# Altium PCB PCB.PcbDoc (part 2 of 4)
Units mil, origin at the board's own origin, x right, y up, seen from the top; angles counter-clockwise.
Board outline 2958.79 x 990.23 mil, 2 copper layers (Component Side, Bottom Layer), stack 63.78 mil thick; 63 components, 40 nets, 198 pads, 73 vias.
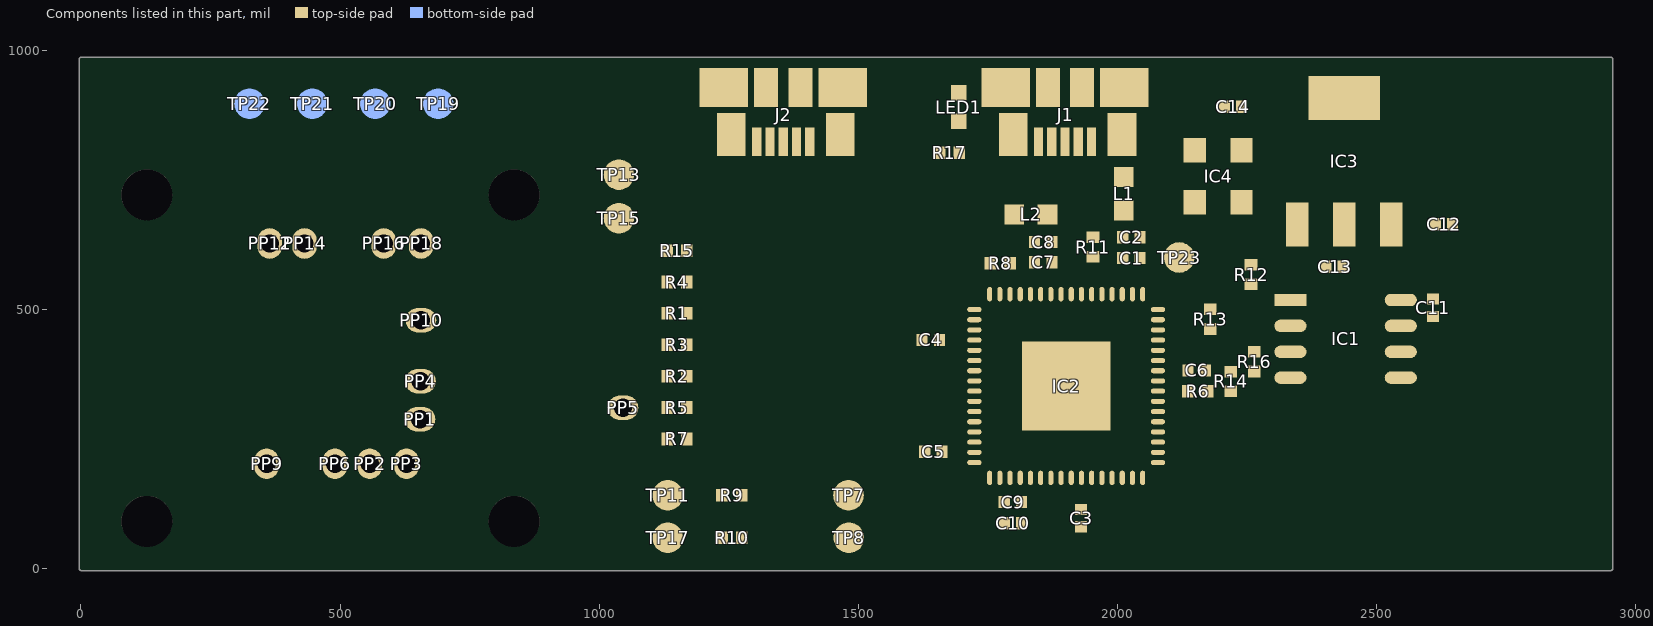
[diagram p2: the components of this part, seen from the top]

## Via types
v1: diameter 23.62, hole 9.84, Component Side to Bottom Layer, 73 vias

## Nets (pads, with @x,y where several pads share a name; then routed paths per layer and width w, separated by ;. In a path a pad name is that pad's centre, name@x,y a point inside that pad or via, vN(x,y) a via of type N, cw(c..) or ccw(c..) an arc to the next point about the centre after c; other vN are vias at no path point) (continued)
copper on no net: (continued)
  Component Side w0.3: 2697.65,749.29 2702.45,749.29 ; 2697.65,749.59 2702.45,749.59 ; 2697.65,749.89 2702.45,749.89 ; 2697.65,750.19 2702.45,750.19 ; 2697.65,750.49 2702.45,750.49 ; 2697.65,750.79 2702.45,750.79 ; 2697.95,745.99 2702.75,745.99 ; 2697.95,746.29 2702.75,746.29 ; 2697.95,746.59 2702.45,746.59 ; 2697.95,746.89 2702.45,746.89 ; 2697.95,747.19 2702.45,747.19 ; 2697.95,747.49 2702.45,747.49 ; 2697.95,747.79 2702.45,747.79 ; 2697.95,748.09 2702.45,748.09 ; 2697.95,748.39 2702.45,748.39 ; 2697.95,748.69 2702.45,748.69 ; 2697.95,748.99 2702.45,748.99 ; 2697.95,751.09 2702.45,751.09 ; 2697.95,751.39 2702.45,751.39 ; 2697.95,751.69 2702.45,751.69 ; 2697.95,751.99 2702.45,751.99 ; 2697.95,752.29 2702.45,752.29 ; 2697.95,752.59 2702.45,752.59 ; 2697.95,752.89 2702.45,752.89 ; 2697.95,753.19 2702.45,753.19 ; 2697.95,753.49 2702.45,753.49 ; 2697.95,753.79 2702.75,753.79 ; 2697.95,754.09 2702.75,754.09 ; 2698.25,744.49 2703.35,744.49 ; 2698.25,744.79 2703.35,744.79 ; 2698.25,745.09 2703.05,745.09 ; 2698.25,745.39 2703.05,745.39 ; 2698.25,745.69 2702.75,745.69 ; 2698.25,754.39 2702.75,754.39 ; 2698.25,754.69 2703.05,754.69 ; 2698.25,754.99 2703.05,754.99 ; 2698.25,755.29 2703.35,755.29 ; 2698.25,755.59 2703.35,755.59 ; 2698.55,743.59 2704.25,743.59 ; 2698.55,743.89 2703.95,743.89 ; 2698.55,744.19 2703.65,744.19 ; 2698.55,755.89 2703.65,755.89 ; 2698.55,756.19 2703.95,756.19 ; 2698.55,756.49 2704.25,756.49 ; 2698.85,742.99 2705.15,742.99 ; 2698.85,743.29 2704.85,743.29 ; 2698.85,756.79 2704.85,756.79 ; 2698.85,757.09 2705.45,757.09 ; 2699.15,742.39 2715.65,742.39 ; 2699.15,742.69 2706.05,742.69 ; 2699.15,757.39 2706.35,757.39 ; 2699.15,757.69 2715.65,757.69 ; 2699.45,742.09 2715.35,742.09 ; 2699.45,757.99 2715.35,757.99 ; 2699.75,741.79 2715.35,741.79 ; 2699.75,758.29 2715.35,758.29 ; 2700.05,741.19 2714.75,741.19 ; 2700.05,741.49 2715.05,741.49 ; 2700.05,758.59 2715.05,758.59 ; 2700.05,758.89 2714.75,758.89 ; 2700.35,740.89 2714.45,740.89 ; 2700.35,759.19 2714.45,759.19 ; 2700.65,740.59 2714.15,740.59 ; 2700.65,759.49 2714.15,759.49 ; 2700.95,740.29 2713.85,740.29 ; 2700.95,759.79 2713.85,759.79 ; 2701.25,739.99 2713.55,739.99 ; 2701.25,760.09 2713.55,760.09 ; 2701.85,739.69 2713.25,739.69 ; 2701.85,760.39 2713.25,760.39 ; 2702.15,739.39 2712.65,739.39 ; 2702.15,760.69 2712.65,760.69 ; 2702.75,739.09 2712.05,739.09 ; 2702.75,760.99 2712.05,760.99 ; 2703.35,738.79 2711.45,738.79 ; 2703.35,761.29 2711.45,761.29 ; 2704.25,738.49 2710.55,738.49 ; 2704.25,761.59 2710.55,761.59 ; 2705.15,761.89 2709.65,761.89 ; 2705.45,738.19 2709.65,738.19 ; 2708.75,742.69 2715.95,742.69 ; 2708.75,757.39 2715.95,757.39 ; 2709.65,742.99 2715.95,742.99 ; 2709.65,757.09 2715.95,757.09 ; 2710.25,743.29 2716.25,743.29 ; 2710.25,756.79 2716.25,756.79 ; 2710.55,743.59 2716.25,743.59 ; 2710.55,756.49 2716.25,756.49 ; 2710.85,743.89 2716.25,743.89 ; 2710.85,756.19 2716.25,756.19 ; 2711.15,744.19 2716.55,744.19 ; 2711.15,755.89 2716.55,755.89 ; 2711.45,744.49 2716.55,744.49 ; 2711.45,755.59 2716.55,755.59 ; 2711.75,744.79 2716.55,744.79 ; 2711.75,745.09 2716.85,745.09 ; 2711.75,754.99 2716.85,754.99 ; 2711.75,755.29 2716.55,755.29 ; 2712.05,745.39 2716.85,745.39 ; 2712.05,745.69 2716.85,745.69 ; 2712.05,754.39 2716.85,754.39 ; 2712.05,754.69 2716.85,754.69 ; 2712.35,745.99 2716.85,745.99 ; 2712.35,746.29 2716.85,746.29 ; 2712.35,746.59 2716.85,746.59 ; 2712.35,746.89 2717.15,746.89 ; 2712.35,747.19 2717.15,747.19 ; 2712.35,747.49 2717.15,747.49 ; 2712.35,752.59 2717.15,752.59 ; 2712.35,752.89 2717.15,752.89 ; 2712.35,753.19 2717.15,753.19 ; 2712.35,753.49 2716.85,753.49 ; 2712.35,753.79 2716.85,753.79 ; 2712.35,754.09 2716.85,754.09 ; 2712.65,747.79 2717.15,747.79 ; 2712.65,748.09 2717.15,748.09 ; 2712.65,748.39 2717.15,748.39 ; 2712.65,748.69 2717.15,748.69 ; 2712.65,748.99 2717.15,748.99 ; 2712.65,749.29 2717.15,749.29 ; 2712.65,749.59 2717.15,749.59 ; 2712.65,749.89 2717.15,749.89 ; 2712.65,750.19 2717.15,750.19 ; 2712.65,750.49 2717.15,750.49 ; 2712.65,750.79 2717.15,750.79 ; 2712.65,751.09 2717.15,751.09 ; 2712.65,751.39 2717.15,751.39 ; 2712.65,751.69 2717.15,751.69 ; 2712.65,751.99 2717.15,751.99 ; 2712.65,752.29 2717.15,752.29 ; 2721.35,700.69 2726.15,700.69 ; 2721.35,700.99 2726.15,700.99 ; 2721.35,701.29 2726.15,701.29 ; 2721.35,701.59 2726.15,701.59 ; 2721.35,701.89 2726.15,701.89 ; 2721.35,702.19 2726.15,702.19 ; 2721.35,702.49 2726.15,702.49 ; 2721.35,702.79 2726.15,702.79 ; 2721.35,703.09 2726.15,703.09 ; 2721.35,703.39 2726.15,703.39 ; 2721.35,703.69 2726.15,703.69 ; 2721.35,703.99 2726.15,703.99 ; 2721.35,704.29 2726.15,704.29 ; 2721.35,704.59 2726.15,704.59 ; 2721.35,704.89 2726.15,704.89 ; 2721.35,705.19 2726.15,705.19 ; 2721.35,705.49 2726.15,705.49 ; 2721.35,705.79 2726.15,705.79 ; 2721.35,706.09 2726.15,706.09 ; 2721.35,706.39 2726.15,706.39 ; 2721.35,706.69 2726.15,706.69 ; 2721.35,706.99 2726.15,706.99 ; 2721.35,707.29 2726.15,707.29 ; 2721.35,707.59 2726.15,707.59 ; 2721.35,707.89 2726.15,707.89 ; 2721.35,708.19 2726.15,708.19 ; 2721.35,708.49 2726.15,708.49 ; 2721.35,708.79 2726.15,708.79 ; 2721.35,709.09 2726.15,709.09 ; 2721.35,709.39 2726.15,709.39 ; 2721.35,709.69 2726.15,709.69 ; 2721.35,709.99 2726.15,709.99 ; 2721.35,710.29 2726.15,710.29 ; 2721.35,710.59 2726.15,710.59 ; 2721.35,710.89 2726.15,710.89 ; 2721.35,711.19 2726.15,711.19 ; 2721.35,711.49 2726.15,711.49 ; 2721.35,711.79 2726.15,711.79 ; 2721.35,712.09 2726.15,712.09 ; 2721.35,712.39 2726.15,712.39 ; 2721.35,712.69 2726.15,712.69 ; 2721.35,712.99 2726.15,712.99 ; 2721.35,713.29 2726.15,713.29 ; 2721.35,713.59 2726.15,713.59 ; 2721.35,713.89 2726.15,713.89 ; 2721.35,714.19 2726.15,714.19 ; 2721.35,714.49 2726.15,714.49 ; 2721.35,714.79 2726.15,714.79 ; 2721.35,715.09 2726.15,715.09 ; 2721.35,715.39 2726.15,715.39 ; 2721.35,715.69 2726.15,715.69 ; 2721.35,715.99 2726.15,715.99 ; 2721.35,716.29 2726.15,716.29 ; 2721.35,716.59 2726.45,716.59 ; 2721.35,716.89 2726.45,716.89 ; 2721.35,717.19 2726.45,717.19 ; 2721.35,717.49 2726.75,717.49 ; 2721.35,717.79 2726.75,717.79 ; 2721.35,718.09 2727.05,718.09 ; 2721.35,718.39 2727.35,718.39 ; 2721.35,718.69 2727.65,718.69 ; 2721.35,718.99 2727.95,718.99 ; 2721.35,719.29 2728.25,719.29 ; 2721.35,719.59 2728.85,719.59 ; 2721.35,719.89 2730.35,719.89 ; 2721.35,720.19 2739.35,720.19 ; 2721.35,720.49 2739.05,720.49 ; 2721.35,720.79 2739.05,720.79 ; 2721.35,721.09 2738.75,721.09 ; 2721.35,721.39 2738.75,721.39 ; 2721.35,721.69 2738.45,721.69 ; 2721.35,721.99 2726.15,721.99 ; 2721.35,722.29 2726.15,722.29 ; 2721.35,722.59 2726.15,722.59 ; 2721.35,722.89 2726.15,722.89 ; 2721.35,723.19 2726.15,723.19 ; 2721.35,723.49 2726.15,723.49 ; 2721.35,723.79 2726.15,723.79 ; 2721.35,724.09 2726.15,724.09 ; 2721.35,724.39 2726.15,724.39 ; 2721.35,724.69 2726.15,724.69 ; 2721.35,724.99 2726.15,724.99 ; 2721.35,725.29 2726.15,725.29 ; 2721.35,725.59 2726.15,725.59 ; 2721.35,725.89 2726.15,725.89 ; 2721.35,726.19 2726.15,726.19 ; 2721.35,726.49 2726.15,726.49 ; 2721.35,726.79 2726.15,726.79 ; 2721.35,727.09 2726.15,727.09 ; 2721.35,727.39 2726.15,727.39 ; 2721.35,727.69 2726.15,727.69 ; 2721.35,727.99 2726.15,727.99 ; 2721.35,728.29 2726.15,728.29 ; 2721.35,728.59 2726.15,728.59 ; 2721.35,728.89 2726.15,728.89 ; 2721.35,729.19 2726.15,729.19 ; 2721.35,729.49 2726.15,729.49 ; 2721.35,729.79 2726.15,729.79 ; 2721.35,730.09 2726.15,730.09 ; 2721.35,730.39 2726.15,730.39 ; 2721.35,730.69 2726.15,730.69 ; 2721.35,730.99 2726.15,730.99 ; 2721.35,731.29 2726.15,731.29 ; 2721.35,731.59 2726.15,731.59 ; 2721.35,731.89 2726.15,731.89 ; 2721.35,732.19 2726.15,732.19 ; 2721.35,732.49 2726.15,732.49 ; 2721.35,732.79 2726.15,732.79 ; 2721.35,733.09 2726.15,733.09 ; 2721.35,733.39 2726.15,733.39 ; 2721.35,733.69 2726.15,733.69 ; 2721.35,733.99 2726.15,733.99 ; 2721.35,734.29 2726.15,734.29 ; 2721.35,734.59 2726.15,734.59 ; 2721.35,734.89 2726.15,734.89 ; 2721.35,735.19 2726.15,735.19 ; 2721.35,735.49 2726.15,735.49 ; 2721.35,735.79 2726.15,735.79 ; 2721.35,736.09 2726.15,736.09 ; 2721.35,736.39 2726.15,736.39 ; 2721.35,736.69 2726.15,736.69 ; 2721.35,736.99 2726.15,736.99 ; 2721.35,737.29 2726.15,737.29 ; 2721.35,737.59 2726.15,737.59 ; 2721.35,737.89 2726.15,737.89 ; 2721.35,738.19 2726.15,738.19 ; 2721.35,738.49 2726.15,738.49 ; 2721.35,738.79 2726.15,738.79 ; 2721.35,739.09 2726.15,739.09 ; 2721.35,739.39 2726.15,739.39 ; 2721.35,739.69 2726.15,739.69 ; 2721.35,739.99 2726.15,739.99 ; 2721.35,740.29 2726.15,740.29 ; 2721.35,740.59 2726.15,740.59 ; 2721.35,740.89 2738.45,740.89 ; 2721.35,741.19 2738.75,741.19 ; 2721.35,741.49 2738.75,741.49 ; 2721.35,741.79 2739.05,741.79 ; 2721.35,742.09 2739.35,742.09 ; 2721.35,742.39 2739.35,742.39 ; 2721.35,742.69 2729.45,742.69 ; 2721.35,742.99 2728.55,742.99 ; 2721.35,743.29 2727.95,743.29 ; 2721.35,743.59 2727.65,743.59 ; 2721.35,743.89 2727.35,743.89 ; 2721.35,744.19 2727.35,744.19 ; 2721.35,744.49 2727.05,744.49 ; 2721.35,744.79 2726.75,744.79 ; 2721.35,745.09 2726.75,745.09 ; 2721.35,745.39 2726.45,745.39 ; 2721.35,745.69 2726.45,745.69 ; 2721.35,745.99 2726.45,745.99 ; 2721.35,746.29 2726.45,746.29 ; 2721.35,746.59 2726.15,746.59 ; 2721.35,746.89 2726.15,746.89 ; 2721.35,747.19 2726.15,747.19 ; 2721.35,747.49 2726.15,747.49 ; 2721.35,747.79 2726.15,747.79 ; 2721.35,748.09 2726.15,748.09 ; 2721.35,748.39 2726.15,748.39 ; 2721.35,748.69 2726.15,748.69 ; 2721.35,748.99 2726.15,748.99 ; 2721.35,749.29 2726.15,749.29 ; 2721.35,749.59 2726.15,749.59 ; 2721.35,749.89 2726.15,749.89 ; 2721.35,750.19 2726.15,750.19 ; 2721.35,750.49 2726.15,750.49 ; 2721.35,750.79 2726.15,750.79 ; 2721.35,751.09 2726.15,751.09 ; 2721.35,751.39 2726.15,751.39 ; 2721.35,751.69 2726.15,751.69 ; 2721.35,751.99 2726.15,751.99 ; 2721.35,752.29 2726.15,752.29 ; 2721.35,752.59 2726.15,752.59 ; 2721.35,752.89 2726.15,752.89 ; 2721.35,753.19 2726.15,753.19 ; 2721.35,753.49 2726.15,753.49 ; 2721.35,753.79 2726.45,753.79 ; 2721.35,754.09 2726.45,754.09 ; 2721.35,754.39 2726.45,754.39 ; 2721.35,754.69 2726.75,754.69 ; 2721.35,754.99 2726.75,754.99 ; 2721.35,755.29 2726.75,755.29 ; 2721.35,755.59 2727.05,755.59 ; 2721.35,755.89 2727.35,755.89 ; 2721.35,756.19 2727.35,756.19 ; 2721.35,756.49 2727.65,756.49 ; 2721.35,756.79 2728.25,756.79 ; 2721.35,757.09 2728.85,757.09 ; 2721.35,757.39 2729.45,757.39 ; 2721.35,757.69 2739.35,757.69 ; 2721.35,757.99 2739.35,757.99 ; 2721.35,758.29 2739.05,758.29 ; 2721.35,758.59 2738.75,758.59 ; 2721.35,758.89 2738.75,758.89 ; 2721.35,759.19 2738.45,759.19 ; 2721.35,759.49 2726.15,759.49 ; 2721.35,759.79 2726.15,759.79 ; 2721.35,760.09 2726.15,760.09 ; 2721.35,760.39 2726.15,760.39 ; 2721.35,760.69 2726.15,760.69 ; 2721.35,760.99 2726.15,760.99 ; 2721.35,761.29 2726.15,761.29 ; 2721.35,761.59 2726.15,761.59 ; 2723.15,840.18 2789.45,840.18 ; 2723.15,840.48 2789.45,840.48 ; 2723.15,840.78 2789.15,840.78 ; 2723.15,841.08 2789.15,841.08 ; 2723.15,841.38 2788.85,841.38 ; 2723.15,841.68 2788.85,841.68 ; 2723.15,841.98 2788.85,841.98 ; 2723.15,842.28 2788.55,842.28 ; 2723.15,842.58 2788.55,842.58 ; 2723.15,842.88 2788.55,842.88 ; 2723.15,843.18 2788.25,843.18 ; 2723.15,843.48 2788.25,843.48 ; 2723.15,843.78 2788.25,843.78 ; 2723.15,844.08 2787.95,844.08 ; 2723.15,844.38 2787.95,844.38 ; 2723.15,844.68 2787.95,844.68 ; 2723.15,844.98 2787.65,844.98 ; 2723.15,845.28 2787.65,845.28 ; 2723.15,845.58 2787.65,845.58 ; 2723.15,845.88 2787.65,845.88 ; 2723.15,846.18 2787.35,846.18 ; 2723.15,846.48 2787.35,846.48 ; 2723.15,846.78 2787.35,846.78 ; 2723.15,847.08 2787.35,847.08 ; 2723.15,847.38 2787.35,847.38 ; 2723.15,847.68 2787.05,847.68 ; 2723.15,847.98 2787.05,847.98 ; 2723.15,848.28 2787.05,848.28 ; 2723.15,848.58 2787.05,848.58 ; 2723.15,848.88 2787.05,848.88 ; 2723.15,849.18 2787.05,849.18 ; 2723.15,849.48 2787.05,849.48 ; 2723.15,849.78 2787.05,849.78 ; 2723.15,850.08 2787.05,850.08 ; 2723.15,850.38 2787.05,850.38 ; 2723.15,850.68 2787.05,850.68 ; 2723.15,850.98 2787.05,850.98 ; 2723.15,851.28 2786.75,851.28 ; 2723.15,851.58 2787.05,851.58 ; 2723.15,851.88 2787.05,851.88 ; 2723.15,852.18 2787.05,852.18 ; 2723.15,852.48 2787.05,852.48 ; 2723.15,852.78 2787.05,852.78 ; 2723.15,853.08 2787.05,853.08 ; 2723.15,853.38 2787.05,853.38 ; 2723.15,853.68 2787.05,853.68 ; 2723.15,853.98 2787.05,853.98 ; 2723.15,854.28 2787.05,854.28 ; 2723.15,854.58 2787.05,854.58 ; 2723.15,854.88 2787.05,854.88 ; 2723.15,855.18 2787.35,855.18 ; 2723.15,855.48 2787.35,855.48 ; 2723.15,855.78 2787.35,855.78 ; 2723.15,856.08 2787.35,856.08 ; 2723.15,856.38 2787.35,856.38 ; 2723.15,856.68 2787.35,856.68 ; 2723.15,856.98 2787.65,856.98 ; 2723.15,857.28 2787.65,857.28 ; 2723.15,857.58 2787.65,857.58 ; 2723.15,857.88 2787.65,857.88 ; 2723.15,858.18 2787.95,858.18 ; 2723.15,858.48 2787.95,858.48 ; 2723.15,858.78 2787.95,858.78 ; 2723.15,859.08 2788.25,859.08 ; 2723.15,859.38 2788.25,859.38 ; 2723.15,859.68 2788.25,859.68 ; 2723.15,859.98 2788.55,859.98 ; 2723.15,860.28 2788.55,860.28 ; 2723.15,860.58 2788.55,860.58 ; 2723.15,860.88 2788.85,860.88 ; 2723.15,861.18 2788.85,861.18 ; 2723.15,861.48 2789.15,861.48 ; 2723.15,861.78 2789.15,861.78 ; 2723.15,862.08 2789.45,862.08 ; 2723.15,862.38 2789.45,862.38 ; 2723.15,862.68 2789.75,862.68 ; 2723.15,862.98 2789.75,862.98 ; 2723.45,839.58 2789.75,839.58 ; 2723.45,839.88 2789.75,839.88 ; 2723.45,863.28 2790.05,863.28 ; 2723.75,863.58 2790.05,863.58 ; 2724.05,839.28 2790.05,839.28 ; 2724.95,863.88 2790.35,863.88 ; 2725.25,838.98 2790.05,838.98 ; 2726.45,721.99 2738.15,721.99 ; 2726.45,740.59 2738.15,740.59 ; 2726.45,759.49 2738.15,759.49 ; 2726.45,864.18 2790.35,864.18 ; 2726.75,722.29 2737.85,722.29 ; 2726.75,740.29 2737.85,740.29 ; 2726.75,759.79 2737.85,759.79 ; 2726.75,838.68 2790.35,838.68 ; 2727.05,722.59 2737.55,722.59 ; 2727.05,739.99 2737.55,739.99 ; 2727.05,760.09 2737.55,760.09 ; 2727.35,722.89 2736.95,722.89 ; 2727.35,739.69 2737.25,739.69 ; 2727.35,760.39 2737.25,760.39 ; 2727.65,760.69 2736.95,760.69 ; 2727.95,723.19 2736.65,723.19 ; 2727.95,739.39 2736.95,739.39 ; 2727.95,864.48 2790.65,864.48 ; 2728.25,760.99 2736.35,760.99 ; 2728.55,723.49 2736.05,723.49 ; 2728.55,739.09 2736.35,739.09 ; 2728.55,838.38 2790.65,838.38 ; 2728.85,723.79 2735.45,723.79 ; 2728.85,738.79 2736.05,738.79 ; 2728.85,761.29 2735.75,761.29 ; 2729.75,724.09 2734.85,724.09 ; 2729.75,738.49 2735.15,738.49 ; 2729.75,761.59 2735.15,761.59 ; 2729.75,864.78 2790.95,864.78 ; 2730.05,838.08 2790.65,838.08 ; 2730.35,738.19 2734.25,738.19 ; 2730.35,761.89 2734.25,761.89 ; 2731.25,724.39 2733.65,724.39 ; 2731.25,865.08 2790.95,865.08 ; 2731.55,719.89 2739.65,719.89 ; 2731.55,837.78 2790.95,837.78 ; 2732.15,742.69 2739.65,742.69 ; 2732.15,757.39 2739.65,757.39 ; 2732.75,719.59 2739.65,719.59 ; 2732.75,865.38 2791.25,865.38 ; 2733.05,742.99 2739.65,742.99 ; 2733.05,757.09 2739.65,757.09 ; 2733.35,719.29 2739.65,719.29 ; 2733.35,837.48 2791.25,837.48 ; 2733.65,718.99 2739.95,718.99 ; 2733.65,743.29 2739.65,743.29 ; 2733.65,756.79 2739.65,756.79 ; 2733.95,743.59 2739.65,743.59 ; 2733.95,756.49 2739.65,756.49 ; 2734.25,718.69 2739.95,718.69 ; 2734.25,743.89 2739.95,743.89 ; 2734.25,756.19 2739.95,756.19 ; 2734.55,718.09 2739.95,718.09 ; 2734.55,718.39 2739.95,718.39 ; 2734.55,744.19 2739.95,744.19 ; 2734.55,755.89 2739.95,755.89 ; 2734.55,865.68 2791.55,865.68 ; 2734.85,717.79 2739.95,717.79 ; 2734.85,744.49 2739.95,744.49 ; 2734.85,744.79 2739.95,744.79 ; 2734.85,755.29 2739.95,755.29 ; 2734.85,755.59 2739.95,755.59 ; 2734.85,837.18 2791.25,837.18 ; 2735.15,717.19 2740.25,717.19 ; 2735.15,717.49 2740.25,717.49 ; 2735.15,745.09 2739.95,745.09 ; 2735.15,745.39 2739.95,745.39 ; 2735.15,745.69 2739.95,745.69 ; 2735.15,754.39 2739.95,754.39 ; 2735.15,754.69 2739.95,754.69 ; 2735.15,754.99 2739.95,754.99 ; 2735.45,715.69 2740.25,715.69 ; 2735.45,715.99 2740.25,715.99 ; 2735.45,716.29 2740.25,716.29 ; 2735.45,716.59 2740.25,716.59 ; 2735.45,716.89 2740.25,716.89 ; 2735.45,745.99 2740.25,745.99 ; 2735.45,746.29 2740.25,746.29 ; 2735.45,746.59 2740.25,746.59 ; 2735.45,746.89 2740.25,746.89 ; 2735.45,747.19 2740.25,747.19 ; 2735.45,747.49 2740.25,747.49 ; 2735.45,752.59 2740.25,752.59 ; 2735.45,752.89 2740.25,752.89 ; 2735.45,753.19 2740.25,753.19 ; 2735.45,753.49 2740.25,753.49 ; 2735.45,753.79 2740.25,753.79 ; 2735.45,754.09 2740.25,754.09 ; 2735.75,700.69 2740.25,700.69 ; 2735.75,700.99 2740.25,700.99 ; 2735.75,701.29 2740.25,701.29 ; 2735.75,701.59 2740.25,701.59 ; 2735.75,701.89 2740.25,701.89 ; 2735.75,702.19 2740.25,702.19 ; 2735.75,702.49 2740.25,702.49 ; 2735.75,702.79 2740.25,702.79 ; 2735.75,703.09 2740.25,703.09 ; 2735.75,703.39 2740.25,703.39 ; 2735.75,703.69 2740.25,703.69 ; 2735.75,703.99 2740.25,703.99 ; 2735.75,704.29 2740.25,704.29 ; 2735.75,704.59 2740.25,704.59 ; 2735.75,704.89 2740.25,704.89 ; 2735.75,705.19 2740.25,705.19 ; 2735.75,705.49 2740.25,705.49 ; 2735.75,705.79 2740.25,705.79 ; 2735.75,706.09 2740.25,706.09 ; 2735.75,706.39 2740.25,706.39 ; 2735.75,706.69 2740.25,706.69 ; 2735.75,706.99 2740.25,706.99 ; 2735.75,707.29 2740.25,707.29 ; 2735.75,707.59 2740.25,707.59 ; 2735.75,707.89 2740.25,707.89 ; 2735.75,708.19 2740.25,708.19 ; 2735.75,708.49 2740.25,708.49 ; 2735.75,708.79 2740.25,708.79 ; 2735.75,709.09 2740.25,709.09 ; 2735.75,709.39 2740.25,709.39 ; 2735.75,709.69 2740.25,709.69 ; 2735.75,709.99 2740.25,709.99 ; 2735.75,710.29 2740.25,710.29 ; 2735.75,710.59 2740.25,710.59 ; 2735.75,710.89 2740.25,710.89 ; 2735.75,711.19 2740.25,711.19 ; 2735.75,711.49 2740.25,711.49 ; 2735.75,711.79 2740.25,711.79 ; 2735.75,712.09 2740.25,712.09 ; 2735.75,712.39 2740.25,712.39 ; 2735.75,712.69 2740.25,712.69 ; 2735.75,712.99 2740.25,712.99 ; 2735.75,713.29 2740.25,713.29 ; 2735.75,713.59 2740.25,713.59 ; 2735.75,713.89 2740.25,713.89 ; 2735.75,714.19 2740.25,714.19 ; 2735.75,714.49 2740.25,714.49 ; 2735.75,714.79 2740.25,714.79 ; 2735.75,715.09 2740.25,715.09 ; 2735.75,715.39 2740.25,715.39 ; 2735.75,747.79 2740.25,747.79 ; 2735.75,748.09 2740.25,748.09 ; 2735.75,748.39 2740.25,748.39 ; 2735.75,748.69 2740.25,748.69 ; 2735.75,748.99 2740.25,748.99 ; 2735.75,749.29 2740.25,749.29 ; 2735.75,749.59 2740.25,749.59 ; 2735.75,749.89 2740.25,749.89 ; 2735.75,750.19 2740.25,750.19 ; 2735.75,750.49 2740.25,750.49 ; 2735.75,750.79 2740.25,750.79 ; 2735.75,751.09 2740.25,751.09 ; 2735.75,751.39 2740.25,751.39 ; 2735.75,751.69 2740.25,751.69 ; 2735.75,751.99 2740.25,751.99 ; 2735.75,752.29 2740.25,752.29 ; 2736.05,865.98 2791.55,865.98 ; 2736.35,836.88 2791.55,836.88 ; 2737.85,866.28 2791.85,866.28 ; 2738.15,836.58 2791.85,836.58 ; 2739.35,866.58 2792.15,866.58 ; 2739.65,836.28 2791.85,836.28 ; 2740.85,797.29 2789.75,797.29 ; 2740.85,797.59 2789.75,797.59 ; 2740.85,866.88 2792.45,866.88 ; 2740.85,905.28 2882.75,905.28 ; 2740.85,905.58 2882.75,905.58 ; 2741.15,796.69 2789.45,796.69 ; 2741.15,796.99 2789.45,796.99 ; 2741.15,797.89 2789.75,797.89 ; 2741.15,798.19 2790.05,798.19 ; 2741.15,904.68 2882.45,904.68 ; 2741.15,904.98 2882.45,904.98 ; 2741.15,905.88 2882.45,905.88 ; 2741.15,906.18 2882.45,906.18 ; 2741.45,796.39 2789.15,796.39 ; 2741.45,798.49 2790.05,798.49 ; 2741.45,798.79 2790.35,798.79 ; 2741.45,835.98 2792.15,835.98 ; 2741.45,904.38 2882.15,904.38 ; 2741.45,906.48 2882.15,906.48 ; 2741.75,796.09 2789.15,796.09 ; 2741.75,799.09 2790.35,799.09 ; 2741.75,903.78 2881.85,903.78 ; 2741.75,904.08 2881.85,904.08 ; 2741.75,906.78 2881.85,906.78 ; 2742.05,795.79 2789.15,795.79 ; 2742.05,799.39 2790.65,799.39 ; 2742.05,799.69 2790.65,799.69 ; 2742.05,903.48 2881.55,903.48 ; 2742.05,907.08 2881.55,907.08 ; 2742.35,795.49 2788.85,795.49 ; 2742.35,799.99 2790.65,799.99 ; 2742.35,902.88 2881.25,902.88 ; 2742.35,903.18 2881.25,903.18 ; 2742.35,907.38 2881.25,907.38 ; 2742.65,795.19 2788.85,795.19 ; 2742.65,800.29 2790.95,800.29 ; 2742.65,800.59 2790.95,800.59 ; 2742.65,867.18 2792.45,867.18 ; 2742.65,902.58 2880.95,902.58 ; 2742.65,907.68 2880.95,907.68 ; 2742.95,794.89 2788.55,794.89 ; 2742.95,800.89 2791.25,800.89 ; 2742.95,835.68 2792.45,835.68 ; 2742.95,901.98 2880.65,901.98 ; 2742.95,902.28 2880.65,902.28 ; 2742.95,907.98 2880.65,907.98 ; 2743.25,794.59 2788.55,794.59 ; 2743.25,801.19 2791.25,801.19 ; 2743.25,901.68 2880.35,901.68 ; 2743.25,908.28 2880.35,908.28 ; 2743.55,794.29 2788.25,794.29 ; 2743.55,801.49 2791.25,801.49 ; 2743.55,801.79 2791.55,801.79 ; 2743.55,901.08 2880.05,901.08 ; 2743.55,901.38 2880.05,901.38 ; 2743.55,908.58 2880.05,908.58 ; 2743.85,706.09 2748.65,706.09 ; 2743.85,706.39 2748.35,706.39 ; 2743.85,706.69 2748.35,706.69 ; 2743.85,706.99 2748.35,706.99 ; 2743.85,707.29 2748.35,707.29 ; 2743.85,707.59 2748.05,707.59 ; 2743.85,707.89 2748.05,707.89 ; 2743.85,708.19 2748.35,708.19 ; 2743.85,708.49 2748.35,708.49 ; 2743.85,708.79 2748.35,708.79 ; 2743.85,746.59 2748.35,746.59 ; 2743.85,746.89 2748.35,746.89 ; 2743.85,747.19 2748.35,747.19 ; 2743.85,747.49 2748.35,747.49 ; 2743.85,747.79 2748.35,747.79 ; 2743.85,748.09 2748.35,748.09 ; 2743.85,748.39 2763.05,748.39 ; 2743.85,748.69 2763.05,748.69 ; 2743.85,748.99 2763.05,748.99 ; 2743.85,749.29 2763.05,749.29 ; 2743.85,749.59 2763.05,749.59 ; 2743.85,749.89 2763.05,749.89 ; 2743.85,750.19 2763.05,750.19 ; 2743.85,750.49 2763.05,750.49 ; 2743.85,750.79 2763.05,750.79 ; 2743.85,751.09 2763.05,751.09 ; 2743.85,751.39 2763.05,751.39 ; 2743.85,751.69 2763.05,751.69 ; 2743.85,751.99 2763.05,751.99 ; 2743.85,752.29 2748.35,752.29 ; 2743.85,752.59 2748.35,752.59 ; 2743.85,752.89 2748.35,752.89 ; 2743.85,753.19 2748.35,753.19 ; 2743.85,793.99 2788.25,793.99 ; 2743.85,802.09 2791.55,802.09 ; 2743.85,900.78 2879.75,900.78 ; 2743.85,908.88 2879.75,908.88 ; 2744.15,705.19 2749.85,705.19 ; 2744.15,705.49 2749.25,705.49 ; 2744.15,705.79 2748.95,705.79 ; 2744.15,709.09 2748.35,709.09 ; 2744.15,709.39 2748.65,709.39 ; 2744.15,709.69 2748.95,709.69 ; 2744.15,709.99 2749.25,709.99 ; 2744.15,745.39 2748.95,745.39 ; 2744.15,745.69 2748.65,745.69 ; 2744.15,745.99 2748.65,745.99 ; 2744.15,746.29 2748.65,746.29 ; 2744.15,753.49 2748.35,753.49 ; 2744.15,753.79 2748.35,753.79 ; 2744.15,754.09 2748.65,754.09 ; 2744.15,754.39 2748.65,754.39 ; 2744.15,793.69 2788.25,793.69 ; 2744.15,802.39 2791.85,802.39 ; 2744.15,802.69 2791.85,802.69 ; 2744.15,867.48 2792.75,867.48 ; 2744.15,900.18 2879.45,900.18 ; 2744.15,900.48 2879.45,900.48 ; 2744.15,909.18 2777.45,909.18 ; 2744.45,704.59 2762.75,704.59 ; 2744.45,704.89 2750.75,704.89 ; 2744.45,710.29 2749.85,710.29 ; 2744.45,710.59 2751.05,710.59 ; 2744.45,744.49 2749.25,744.49 ; 2744.45,744.79 2749.25,744.79 ; 2744.45,745.09 2748.95,745.09 ; 2744.45,754.69 2748.65,754.69 ; 2744.45,754.99 2748.95,754.99 ; 2744.45,755.29 2748.95,755.29 ; 2744.45,755.59 2749.25,755.59 ; 2744.45,793.39 2787.95,793.39 ; 2744.45,802.99 2791.85,802.99 ; 2744.45,835.38 2792.75,835.38 ; 2744.45,899.88 2879.15,899.88 ; 2744.45,909.48 2776.85,909.48 ; 2744.75,703.99 2762.75,703.99 ; 2744.75,704.29 2762.75,704.29 ; 2744.75,710.89 2762.75,710.89 ; 2744.75,711.19 2762.75,711.19 ; 2744.75,743.59 2750.15,743.59 ; 2744.75,743.89 2749.85,743.89 ; 2744.75,744.19 2749.55,744.19 ; 2744.75,755.89 2749.55,755.89 ; 2744.75,756.19 2749.55,756.19 ; 2744.75,793.09 2787.95,793.09 ; 2744.75,803.29 2792.15,803.29 ; 2744.75,803.59 2792.15,803.59 ; 2744.75,899.58 2878.85,899.58 ; 2744.75,909.78 2776.55,909.78 ; 2745.05,703.39 2762.75,703.39 ; 2745.05,703.69 2762.75,703.69 ; 2745.05,711.49 2762.75,711.49 ; 2745.05,721.09 2761.55,721.09 ; 2745.05,742.99 2751.05,742.99 ; 2745.05,743.29 2750.45,743.29 ; 2745.05,756.49 2749.85,756.49 ; 2745.05,756.79 2750.45,756.79 ; 2745.05,792.79 2776.25,792.79 ; 2745.05,803.89 2792.45,803.89 ; 2745.05,898.98 2878.55,898.98 ; 2745.05,899.28 2878.55,899.28 ; 2745.05,910.08 2776.25,910.08 ; 2745.35,703.09 2762.75,703.09 ; 2745.35,711.79 2762.75,711.79 ; 2745.35,721.39 2761.55,721.39 ; 2745.35,742.39 2752.55,742.39 ; 2745.35,742.69 2751.65,742.69 ; 2745.35,757.09 2750.75,757.09 ; 2745.35,757.39 2751.35,757.39 ; 2745.35,792.49 2775.65,792.49 ; 2745.35,804.19 2792.45,804.19 ; 2745.35,804.49 2792.75,804.49 ; 2745.35,898.68 2878.25,898.68 ; 2745.35,910.38 2775.65,910.38 ; 2745.65,702.79 2762.75,702.79 ; 2745.65,712.09 2762.75,712.09 ; 2745.65,712.39 2762.75,712.39 ; 2745.65,720.79 2761.85,720.79 ; 2745.65,721.69 2761.25,721.69 ; 2745.65,721.99 2760.95,721.99 ; 2745.65,742.09 2762.15,742.09 ; 2745.65,757.69 2752.25,757.69 ; 2745.65,757.99 2761.55,757.99 ; 2745.65,792.19 2775.05,792.19 ; 2745.65,804.79 2792.75,804.79 ; 2745.65,835.08 2793.05,835.08 ; 2745.65,867.78 2793.05,867.78 ; 2745.65,898.08 2877.95,898.08 ; 2745.65,898.38 2877.95,898.38 ; 2745.65,910.68 2775.35,910.68 ; 2745.95,702.49 2757.65,702.49 ; 2745.95,720.49 2762.15,720.49 ; 2745.95,741.49 2762.45,741.49 ; 2745.95,741.79 2762.45,741.79 ; 2745.95,758.29 2761.25,758.29 ; 2745.95,791.89 2774.75,791.89 ; 2745.95,805.09 2792.75,805.09 ; 2745.95,805.39 2793.05,805.39 ; 2745.95,897.78 2877.65,897.78 ; 2745.95,910.98 2774.75,910.98 ; 2746.25,702.19 2757.35,702.19 ; 2746.25,712.69 2762.75,712.69 ; 2746.25,720.19 2752.85,720.19 ; 2746.25,722.29 2760.65,722.29 ; 2746.25,741.19 2762.15,741.19 ; 2746.25,758.59 2760.95,758.59 ; 2746.25,758.89 2760.65,758.89 ; 2746.25,791.59 2774.15,791.59 ; 2746.25,805.69 2793.05,805.69 ; 2746.25,834.48 2793.35,834.48 ; 2746.25,834.78 2793.35,834.78 ; 2746.25,868.08 2793.35,868.08 ; 2746.25,897.18 2877.35,897.18 ; 2746.25,897.48 2877.35,897.48 ; 2746.25,911.28 2774.45,911.28 ; 2746.55,712.99 2762.75,712.99 ; 2746.55,722.59 2760.35,722.59 ; 2746.55,740.89 2761.85,740.89 ; 2746.55,759.19 2760.35,759.19 ; 2746.55,791.29 2773.85,791.29 ; 2746.55,805.99 2793.35,805.99 ; 2746.55,834.18 2793.65,834.18 ; 2746.55,896.88 2877.05,896.88 ; 2746.55,911.58 2773.85,911.58 ; 2746.85,701.89 2757.35,701.89 ; 2746.85,713.29 2762.75,713.29 ; 2746.85,719.89 2750.75,719.89 ; 2746.85,722.89 2760.05,722.89 ; 2746.85,740.59 2761.25,740.59 ; 2746.85,759.49 2760.05,759.49 ; 2746.85,790.99 2773.25,790.99 ; 2746.85,806.29 2793.35,806.29 ; 2746.85,806.59 2793.35,806.59 ; 2746.85,833.28 2794.85,833.28 ; 2746.85,833.58 2794.25,833.58 ; 2746.85,833.88 2793.95,833.88 ; 2746.85,868.38 2793.65,868.38 ; 2746.85,896.28 2876.75,896.28 ; 2746.85,896.58 2876.75,896.58 ; 2746.85,911.88 2773.55,911.88 ; 2747.15,701.59 2757.05,701.59 ; 2747.15,719.59 2749.85,719.59 ; 2747.15,740.29 2760.95,740.29 ; 2747.15,759.79 2759.75,759.79 ; 2747.15,790.69 2772.95,790.69 ; 2747.15,806.89 2793.65,806.89 ; 2747.15,832.68 2795.45,832.68 ; 2747.15,832.98 2795.15,832.98 ; 2747.15,868.68 2793.95,868.68 ; 2747.15,868.98 2794.25,868.98 ; 2747.15,895.98 2876.45,895.98 ; 2747.15,912.18 2772.95,912.18 ; 2747.45,713.59 2762.75,713.59 ; 2747.45,719.29 2749.55,719.29 ; 2747.45,723.19 2759.45,723.19 ; 2747.45,739.99 2760.65,739.99 ; 2747.45,760.09 2759.45,760.09 ; 2747.45,790.39 2772.65,790.39 ; 2747.45,807.19 2793.65,807.19 ; 2747.45,807.49 2793.95,807.49 ; 2747.45,831.78 2796.35,831.78 ; 2747.45,832.08 2796.05,832.08 ; 2747.45,832.38 2795.75,832.38 ; 2747.45,869.28 2794.55,869.28 ; 2747.45,869.58 2794.85,869.58 ; 2747.45,895.38 2876.15,895.38 ; 2747.45,895.68 2876.15,895.68 ; 2747.45,912.48 2772.65,912.48 ; 2747.75,701.29 2756.45,701.29 ; 2747.75,723.49 2758.85,723.49 ; 2747.75,790.09 2772.05,790.09 ; 2747.75,807.79 2793.95,807.79 ; 2747.75,831.18 2797.25,831.18 ; 2747.75,831.48 2796.95,831.48 ; 2747.75,869.88 2795.15,869.88 ; 2747.75,870.18 2795.45,870.18 ; 2747.75,870.48 2795.75,870.48 ; 2747.75,895.08 2875.85,895.08 ; 2747.75,912.78 2772.05,912.78 ; 2748.05,713.89 2762.75,713.89 ; 2748.05,718.99 2749.25,718.99 ; 2748.05,739.69 2760.05,739.69 ; 2748.05,760.39 2758.85,760.39 ; 2748.05,789.79 2771.75,789.79 ; 2748.05,808.09 2794.25,808.09 ; 2748.05,808.39 2794.25,808.39 ; 2748.05,830.28 2798.45,830.28 ; 2748.05,830.58 2798.15,830.58 ; 2748.05,830.88 2797.55,830.88 ; 2748.05,870.78 2796.35,870.78 ; 2748.05,871.08 2796.65,871.08 ; 2748.05,894.48 2875.55,894.48 ; 2748.05,894.78 2875.55,894.78 ; 2748.05,913.08 2771.75,913.08 ; 2748.35,700.99 2755.85,700.99 ; 2748.35,718.69 2748.95,718.69 ; 2748.35,739.39 2759.75,739.39 ; 2748.35,760.69 2758.55,760.69 ; 2748.35,789.49 2771.15,789.49 ; 2748.35,808.69 2794.25,808.69 ; 2748.35,829.68 2799.35,829.68 ; 2748.35,829.98 2798.75,829.98 ; 2748.35,871.38 2796.95,871.38 ; 2748.35,871.68 2797.55,871.68 ; 2748.35,894.18 2875.25,894.18 ; 2748.35,913.38 2771.45,913.38 ; 2748.65,723.79 2757.95,723.79 ; 2748.65,789.19 2770.85,789.19 ; 2748.65,808.99 2794.55,808.99 ; 2748.65,809.29 2794.55,809.29 ; 2748.65,828.78 2800.55,828.78 ; 2748.65,829.08 2800.25,829.08 ; 2748.65,829.38 2799.65,829.38 ; 2748.65,871.98 2797.85,871.98 ; 2748.65,872.28 2798.45,872.28 ; 2748.65,872.58 2798.75,872.58 ; 2748.65,893.88 2874.95,893.88 ; 2748.65,913.68 2770.85,913.68 ; 2748.95,739.09 2759.15,739.09 ; 2748.95,760.99 2757.95,760.99 ; 2748.95,788.89 2770.25,788.89 ; 2748.95,809.59 2794.85,809.59 ; 2748.95,828.18 2801.45,828.18 ; 2748.95,828.48 2801.15,828.48 ; 2748.95,872.88 2799.35,872.88 ; 2748.95,873.18 2799.95,873.18 ; 2748.95,893.28 2874.65,893.28 ; 2748.95,893.58 2874.65,893.58 ; 2748.95,913.98 2770.55,913.98 ; 2749.25,714.19 2762.75,714.19 ; 2749.25,788.59 2769.95,788.59 ; 2749.25,809.89 2794.85,809.89 ; 2749.25,810.19 2794.85,810.19 ; 2749.25,827.28 2802.05,827.28 ; 2749.25,827.58 2802.05,827.58 ; 2749.25,827.88 2801.75,827.88 ; 2749.25,873.48 2800.55,873.48 ; 2749.25,873.78 2801.15,873.78 ; 2749.25,892.98 2874.35,892.98 ; 2749.25,914.28 2769.95,914.28 ; 2749.55,700.69 2754.95,700.69 ; 2749.55,724.09 2757.05,724.09 ; 2749.55,761.29 2757.35,761.29 ; 2749.55,788.29 2769.35,788.29 ; 2749.55,810.49 2795.15,810.49 ; 2749.55,826.68 2801.75,826.68 ; 2749.55,826.98 2802.05,826.98 ; 2749.55,874.08 2801.75,874.08 ; 2749.55,874.38 2802.35,874.38 ; 2749.55,874.68 2803.25,874.68 ; 2749.55,892.38 2874.05,892.38 ; 2749.55,892.68 2874.05,892.68 ; 2749.55,914.58 2769.65,914.58 ; 2749.85,738.79 2758.55,738.79 ; 2749.85,787.99 2769.05,787.99 ; 2749.85,810.79 2795.15,810.79 ; 2749.85,811.09 2795.45,811.09 ; 2749.85,825.78 2801.45,825.78 ; 2749.85,826.08 2801.45,826.08 ; 2749.85,826.38 2801.75,826.38 ; 2749.85,874.98 2803.85,874.98 ; 2749.85,875.28 2805.05,875.28 ; 2749.85,892.08 2873.75,892.08 ; 2749.85,914.88 2769.05,914.88 ; 2750.15,761.59 2756.45,761.59 ; 2750.15,787.69 2768.45,787.69 ; 2750.15,811.39 2795.45,811.39 ; 2750.15,825.18 2801.15,825.18 ; 2750.15,825.49 2801.45,825.49 ; 2750.15,875.58 2806.25,875.58 ; 2750.15,875.88 2807.75,875.88 ; 2750.15,876.18 2810.15,876.18 ; 2750.15,891.48 2873.45,891.48 ; 2750.15,891.78 2873.45,891.78 ; 2750.15,915.18 2768.75,915.18 ; 2750.45,738.49 2757.65,738.49 ; 2750.45,787.39 2768.15,787.39 ; 2750.45,811.69 2795.45,811.69 ; 2750.45,824.28 2800.85,824.28 ; 2750.45,824.58 2800.85,824.58 ; 2750.45,824.88 2801.15,824.88 ; 2750.45,876.48 2873.15,876.48 ; 2750.45,876.78 2873.15,876.78 ; 2750.45,891.18 2873.15,891.18 ; 2750.45,915.48 2768.15,915.48 ; 2750.75,787.09 2767.85,787.09 ; 2750.75,811.99 2795.75,811.99 ; 2750.75,812.29 2795.75,812.29 ; 2750.75,823.68 2800.55,823.68 ; 2750.75,823.99 2800.55,823.99 ; 2750.75,877.08 2872.85,877.08 ; 2750.75,877.38 2872.85,877.38 ; 2750.75,890.58 2872.85,890.58 ; 2750.75,890.88 2872.85,890.88 ; 2750.75,915.78 2767.85,915.78 ; 2751.05,786.79 2767.25,786.79 ; 2751.05,812.59 2796.05,812.59 ; 2751.05,822.78 2800.25,822.78 ; 2751.05,823.09 2800.25,823.09 ; 2751.05,823.38 2800.55,823.38 ; 2751.05,877.68 2872.55,877.68 ; 2751.05,877.98 2872.55,877.98 ; 2751.05,878.28 2872.55,878.28 ; 2751.05,890.28 2872.55,890.28 ; 2751.05,916.08 2767.25,916.08 ; 2751.35,724.39 2755.25,724.39 ; 2751.35,761.89 2755.55,761.89 ; 2751.35,786.49 2766.95,786.49 ; 2751.35,812.89 2796.05,812.89 ; 2751.35,813.19 2796.35,813.19 ; 2751.35,822.18 2799.95,822.18 ; 2751.35,822.49 2799.95,822.49 ; 2751.35,878.58 2872.25,878.58 ; 2751.35,878.88 2872.25,878.88 ; 2751.35,889.68 2872.25,889.68 ; 2751.35,889.98 2872.25,889.98 ; 2751.35,916.38 2766.95,916.38 ; 2751.65,700.39 2752.85,700.39 ; 2751.65,738.19 2756.45,738.19 ; 2751.65,786.19 2766.35,786.19 ; 2751.65,813.49 2796.35,813.49 ; 2751.65,821.28 2799.65,821.28 ; 2751.65,821.59 2799.65,821.59 ; 2751.65,821.88 2799.95,821.88 ; 2751.65,879.18 2871.95,879.18 ; 2751.65,879.48 2871.95,879.48 ; 2751.65,889.38 2871.95,889.38 ; 2751.65,916.68 2766.35,916.68 ; 2751.95,785.89 2766.05,785.89 ; 2751.95,813.79 2796.35,813.79 ; 2751.95,814.09 2796.65,814.09 ; 2751.95,820.68 2799.35,820.68 ; 2751.95,820.99 2799.35,820.99 ; 2751.95,879.78 2871.65,879.78 ; 2751.95,880.08 2871.65,880.08 ; 2751.95,880.38 2871.65,880.38 ; 2751.95,889.08 2871.65,889.08 ; 2751.95,916.98 2766.05,916.98 ; 2752.25,785.59 2765.45,785.59 ; 2752.25,814.39 2796.65,814.39 ; 2752.25,819.78 2799.05,819.78 ; 2752.25,820.09 2799.05,820.09 ; 2752.25,820.38 2799.05,820.38 ; 2752.25,880.68 2871.35,880.68 ; 2752.25,880.98 2871.35,880.98 ; 2752.25,888.48 2871.35,888.48 ; 2752.25,888.78 2871.35,888.78 ; 2752.25,917.28 2765.75,917.28 ; 2752.55,785.29 2765.15,785.29 ; 2752.55,814.69 2796.95,814.69 ; 2752.55,814.99 2796.95,814.99 ; 2752.55,819.18 2798.75,819.18 ; 2752.55,819.49 2798.75,819.49 ; 2752.55,881.28 2871.05,881.28 ; 2752.55,881.58 2871.05,881.58 ; 2752.55,888.18 2871.05,888.18 ; 2752.55,917.58 2765.15,917.58 ; 2752.85,784.99 2764.55,784.99 ; 2752.85,815.29 2796.95,815.29 ; 2752.85,818.28 2798.45,818.28 ; 2752.85,818.59 2798.45,818.59 ; 2752.85,818.88 2798.45,818.88 ; 2752.85,881.88 2870.75,881.88 ; 2752.85,882.18 2870.75,882.18 ; 2752.85,882.48 2870.75,882.48 ; 2752.85,887.58 2870.75,887.58 ; 2752.85,887.88 2870.75,887.88 ; 2752.85,917.88 2764.85,917.88 ; 2753.15,784.69 2764.25,784.69 ; 2753.15,815.59 2797.25,815.59 ; 2753.15,815.89 2797.25,815.89 ; 2753.15,817.68 2798.15,817.68 ; 2753.15,817.99 2798.15,817.99 ; 2753.15,882.78 2870.45,882.78 ; 2753.15,883.08 2870.45,883.08 ; 2753.15,887.28 2870.45,887.28 ; 2753.15,918.18 2764.25,918.18 ; 2753.45,720.19 2762.15,720.19 ; 2753.45,784.39 2763.65,784.39 ; 2753.45,816.18 2797.55,816.18 ; 2753.45,816.49 2797.55,816.49 ; 2753.45,816.79 2797.85,816.79 ; 2753.45,817.09 2797.85,817.09 ; 2753.45,817.38 2797.85,817.38 ; 2753.45,883.38 2870.15,883.38 ; 2753.45,883.68 2870.15,883.68 ; 2753.45,886.68 2870.15,886.68 ; 2753.45,886.98 2870.15,886.98 ; 2753.45,918.48 2763.95,918.48 ; 2753.75,784.09 2763.35,784.09 ; 2753.75,883.98 2869.85,883.98 ; 2753.75,884.28 2869.85,884.28 ; 2753.75,884.58 2869.85,884.58 ; 2753.75,886.08 2869.85,886.08 ; 2753.75,886.38 2869.85,886.38 ; 2753.75,918.78 2763.35,918.78 ; 2754.05,783.79 2763.05,783.79 ; 2754.05,884.88 2869.55,884.88 ; 2754.05,885.18 2869.55,885.18 ; 2754.05,885.48 2869.55,885.48 ; 2754.05,885.78 2869.55,885.78 ; 2754.05,919.08 2763.05,919.08 ; 2754.35,783.49 2762.45,783.49 ; 2754.35,919.38 2762.45,919.38 ; 2754.65,757.69 2761.55,757.69 ; 2754.65,783.19 2762.15,783.19 ; 2754.65,919.68 2762.15,919.68 ; 2754.95,782.89 2761.55,782.89 ; 2754.95,919.98 2761.55,919.98 ; 2755.25,742.39 2761.85,742.39 ; 2755.25,782.59 2761.25,782.59 ; 2755.25,920.28 2761.25,920.28 ; 2755.55,757.39 2761.85,757.39 ; 2755.55,782.29 2760.65,782.29 ; 2755.55,920.58 2760.95,920.58 ; 2755.85,704.89 2762.75,704.89 ; 2755.85,719.89 2762.15,719.89 ; 2755.85,781.99 2760.35,781.99 ; 2755.85,920.88 2760.35,920.88 ; 2756.15,757.09 2761.85,757.09 ; 2756.15,781.69 2759.75,781.69 ; 2756.15,921.18 2760.05,921.18 ; 2756.45,742.69 2761.55,742.69 ; 2756.45,756.79 2762.15,756.79 ; 2756.45,781.39 2759.45,781.39 ; 2756.45,921.48 2759.45,921.48 ; 2756.75,705.19 2762.75,705.19 ; 2756.75,719.59 2762.45,719.59 ; 2756.75,756.49 2762.15,756.49 ; 2756.75,781.09 2758.85,781.09 ; 2756.75,921.78 2759.15,921.78 ; 2757.05,705.49 2762.75,705.49 ; 2757.05,742.99 2760.95,742.99 ; 2757.05,756.19 2762.45,756.19 ; 2757.05,922.08 2758.55,922.08 ; 2757.35,705.79 2762.75,705.79 ; 2757.35,719.29 2762.45,719.29 ; 2757.35,755.89 2762.45,755.89 ; 2757.35,780.79 2758.55,780.79 ; 2757.65,706.09 2762.75,706.09 ; 2757.65,706.39 2762.75,706.39 ; 2757.65,718.69 2762.45,718.69 ; 2757.65,718.99 2762.45,718.99 ; 2757.65,743.29 2760.65,743.29 ; 2757.65,755.29 2762.75,755.29 ; 2757.65,755.59 2762.45,755.59 ; 2757.95,706.69 2762.75,706.69 ; 2757.95,706.99 2762.75,706.99 ; 2757.95,707.29 2762.75,707.29 ; 2757.95,714.49 2762.75,714.49 ; 2757.95,718.09 2762.75,718.09 ; 2757.95,718.39 2762.75,718.39 ; 2757.95,754.69 2762.75,754.69 ; 2757.95,754.99 2762.75,754.99 ; 2758.25,700.69 2762.75,700.69 ; 2758.25,700.99 2762.75,700.99 ; 2758.25,701.29 2762.75,701.29 ; 2758.25,701.59 2762.75,701.59 ; 2758.25,701.89 2762.75,701.89 ; 2758.25,702.19 2762.75,702.19 ; 2758.25,702.49 2762.75,702.49 ; 2758.25,707.59 2762.75,707.59 ; 2758.25,707.89 2762.75,707.89 ; 2758.25,708.19 2762.75,708.19 ; 2758.25,708.49 2762.75,708.49 ; 2758.25,708.79 2762.75,708.79 ; 2758.25,709.09 2762.75,709.09 ; 2758.25,709.39 2762.75,709.39 ; 2758.25,709.69 2762.75,709.69 ; 2758.25,709.99 2762.75,709.99 ; 2758.25,710.29 2762.75,710.29 ; 2758.25,710.59 2762.75,710.59 ; 2758.25,714.79 2762.75,714.79 ; 2758.25,715.09 2762.75,715.09 ; 2758.25,715.39 2762.75,715.39 ; 2758.25,715.69 2762.75,715.69 ; 2758.25,715.99 2762.75,715.99 ; 2758.25,716.29 2762.75,716.29 ; 2758.25,716.59 2762.75,716.59 ; 2758.25,716.89 2762.75,716.89 ; 2758.25,717.19 2762.75,717.19 ; 2758.25,717.49 2762.75,717.49 ; 2758.25,717.79 2762.75,717.79 ; 2758.25,743.59 2760.35,743.59 ; 2758.25,753.49 2763.05,753.49 ; 2758.25,753.79 2763.05,753.79 ; 2758.25,754.09 2763.05,754.09 ; 2758.25,754.39 2762.75,754.39 ; 2758.55,743.89 2760.05,743.89 ; 2758.55,752.29 2763.05,752.29 ; 2758.55,752.59 2763.05,752.59 ; 2758.55,752.89 2763.05,752.89 ; 2758.55,753.19 2763.05,753.19 ; 2758.85,744.19 2759.75,744.19 ; 2767.55,738.49 2772.05,738.49 ; 2767.55,738.79 2772.05,738.79 ; 2767.55,739.09 2772.05,739.09 ; 2767.55,739.39 2772.05,739.39 ; 2767.55,739.69 2772.05,739.69 ; 2767.55,739.99 2772.05,739.99 ; 2767.55,740.29 2772.05,740.29 ; 2767.55,740.59 2772.05,740.59 ; 2767.55,740.89 2772.05,740.89 ; 2767.55,741.19 2772.05,741.19 ; 2767.55,741.49 2772.05,741.49 ; 2767.55,741.79 2772.05,741.79 ; 2767.55,742.09 2772.05,742.09 ; 2767.55,742.39 2772.05,742.39 ; 2767.55,742.69 2772.05,742.69 ; 2767.55,742.99 2772.05,742.99 ; 2767.55,743.29 2772.05,743.29 ; 2767.55,743.59 2772.05,743.59 ; 2767.55,743.89 2772.05,743.89 ; 2767.55,744.19 2772.05,744.19 ; 2767.55,744.49 2772.05,744.49 ; 2767.55,744.79 2772.05,744.79 ; 2767.55,745.09 2772.05,745.09 ; 2767.55,745.39 2772.05,745.39 ; 2767.55,745.69 2772.05,745.69 ; 2767.55,745.99 2772.05,745.99 ; 2767.55,746.29 2772.05,746.29 ; 2767.55,746.59 2772.05,746.59 ; 2767.55,746.89 2772.05,746.89 ; 2767.55,747.19 2772.05,747.19 ; 2767.55,747.49 2772.05,747.49 ; 2767.55,747.79 2772.05,747.79 ; 2767.55,748.09 2772.05,748.09 ; 2767.55,748.39 2772.05,748.39 ; 2767.55,748.69 2772.05,748.69 ; 2767.55,748.99 2772.05,748.99 ; 2767.55,749.29 2772.05,749.29 ; 2767.55,749.59 2772.05,749.59 ; 2767.55,749.89 2772.05,749.89 ; 2767.55,750.19 2772.05,750.19 ; 2767.55,750.49 2772.05,750.49 ; 2767.55,750.79 2772.05,750.79 ; 2767.55,751.09 2772.05,751.09 ; 2767.55,751.39 2772.05,751.39 ; 2767.55,751.69 2772.05,751.69 ; 2767.55,751.99 2772.05,751.99 ; 2767.55,752.29 2772.05,752.29 ; 2767.55,752.59 2772.05,752.59 ; 2767.55,752.89 2772.05,752.89 ; 2767.55,753.19 2772.05,753.19 ; 2767.55,753.49 2772.05,753.49 ; 2767.55,753.79 2772.05,753.79 ; 2767.55,754.09 2772.35,754.09 ; 2767.55,754.39 2772.35,754.39 ; 2767.55,754.69 2772.35,754.69 ; 2767.55,754.99 2772.65,754.99 ; 2767.55,755.29 2772.65,755.29 ; 2767.55,755.59 2772.95,755.59 ; 2767.55,755.89 2773.25,755.89 ; 2767.55,756.19 2773.55,756.19 ; 2767.55,756.49 2773.85,756.49 ; 2767.55,756.79 2774.15,756.79 ; 2767.55,757.09 2774.75,757.09 ; 2767.55,757.39 2775.65,757.39 ; 2767.55,757.69 2785.25,757.69 ; 2767.55,757.99 2785.25,757.99 ; 2767.55,758.29 2784.95,758.29 ; 2767.55,758.59 2784.95,758.59 ; 2767.55,758.89 2784.65,758.89 ; 2767.55,759.19 2784.35,759.19 ; 2767.55,759.49 2772.05,759.49 ; 2767.55,759.79 2772.05,759.79 ; 2767.55,760.09 2772.05,760.09 ; 2767.55,760.39 2772.05,760.39 ; 2767.55,760.69 2772.05,760.69 ; 2767.55,760.99 2772.05,760.99 ; 2767.55,761.29 2772.05,761.29 ; 2767.55,761.59 2772.05,761.59 ; 2768.15,700.69 2772.95,700.69 ; 2768.15,700.99 2772.95,700.99 ; 2768.15,701.29 2772.95,701.29 ; 2768.15,701.59 2772.95,701.59 ; 2768.15,701.89 2772.95,701.89 ; 2768.15,702.19 2772.95,702.19 ; 2768.15,702.49 2772.95,702.49 ; 2768.15,702.79 2772.95,702.79 ; 2768.15,703.09 2772.95,703.09 ; 2768.15,703.39 2772.95,703.39 ; 2768.15,703.69 2772.95,703.69 ; 2768.15,703.99 2772.95,703.99 ; 2768.15,704.29 2772.95,704.29 ; 2768.15,704.59 2772.95,704.59 ; 2768.15,704.89 2772.95,704.89 ; 2768.15,705.19 2772.95,705.19 ; 2768.15,705.49 2772.95,705.49 ; 2768.15,705.79 2772.95,705.79 ; 2768.15,706.09 2772.95,706.09 ; 2768.15,706.39 2772.95,706.39 ; 2768.15,706.69 2772.95,706.69 ; 2768.15,706.99 2772.95,706.99 ; 2768.15,707.29 2772.95,707.29 ; 2768.15,707.59 2772.95,707.59 ; 2768.15,707.89 2772.95,707.89 ; 2768.15,708.19 2772.95,708.19 ; 2768.15,708.49 2772.95,708.49 ; 2768.15,708.79 2772.95,708.79 ; 2768.15,709.09 2772.95,709.09 ; 2768.15,709.39 2772.95,709.39 ; 2768.15,709.69 2772.95,709.69 ; 2768.15,709.99 2772.95,709.99 ; 2768.15,710.29 2772.95,710.29 ; 2768.15,710.59 2772.95,710.59 ; 2768.15,710.89 2772.95,710.89 ; 2768.15,711.19 2772.95,711.19 ; 2768.15,711.49 2772.95,711.49 ; 2768.15,711.79 2772.95,711.79 ; 2768.15,712.09 2772.95,712.09 ; 2768.15,712.39 2772.95,712.39 ; 2768.15,712.69 2772.95,712.69 ; 2768.15,712.99 2772.95,712.99 ; 2768.15,713.29 2772.95,713.29 ; 2768.15,713.59 2772.95,713.59 ; 2768.15,713.89 2772.95,713.89 ; 2768.15,714.19 2772.95,714.19 ; 2768.15,714.49 2772.95,714.49 ; 2768.15,714.79 2772.95,714.79 ; 2768.15,715.09 2772.95,715.09 ; 2768.15,715.39 2772.95,715.39 ; 2768.15,715.69 2772.95,715.69 ; 2768.15,715.99 2772.95,715.99 ; 2768.15,716.29 2772.95,716.29 ; 2768.15,716.59 2772.95,716.59 ; 2768.15,716.89 2773.25,716.89 ; 2768.15,717.19 2773.25,717.19 ; 2768.15,717.49 2773.55,717.49 ; 2768.15,717.79 2773.55,717.79 ; 2768.15,718.09 2773.85,718.09 ; 2768.15,718.39 2774.15,718.39 ; 2768.15,718.69 2774.15,718.69 ; 2768.15,718.99 2774.75,718.99 ; 2768.15,719.29 2775.05,719.29 ; 2768.15,719.59 2775.65,719.59 ; 2768.15,719.89 2777.15,719.89 ; 2768.15,720.19 2781.95,720.19 ; 2768.15,720.49 2782.25,720.49 ; 2768.15,720.79 2782.25,720.79 ; 2768.15,721.09 2782.55,721.09 ; 2768.15,721.39 2782.85,721.39 ; 2768.15,721.69 2783.15,721.69 ; 2768.15,721.99 2772.95,721.99 ; 2768.15,722.29 2772.95,722.29 ; 2768.15,722.59 2772.95,722.59 ; 2768.15,722.89 2772.95,722.89 ; 2768.15,723.19 2772.95,723.19 ; 2768.15,723.49 2772.95,723.49 ; 2768.15,723.79 2772.95,723.79 ; 2768.15,724.09 2772.95,724.09 ; 2772.35,759.49 2784.05,759.49 ; 2772.65,759.79 2783.75,759.79 ; 2772.95,760.09 2783.75,760.09 ; 2773.25,721.99 2783.45,721.99 ; 2773.25,760.39 2783.15,760.39 ; 2773.55,722.29 2783.75,722.29 ; 2773.85,722.59 2783.75,722.59 ; 2773.85,760.69 2782.85,760.69 ; 2774.15,722.89 2783.75,722.89 ; 2774.15,760.99 2782.25,760.99 ; 2774.75,723.19 2783.45,723.19 ; 2774.75,761.29 2781.65,761.29 ; 2775.35,723.49 2782.85,723.49 ; 2775.35,761.59 2781.05,761.59 ; 2775.65,723.79 2782.25,723.79 ; 2776.55,724.09 2781.65,724.09 ; 2776.55,761.89 2780.15,761.89 ; 2776.85,792.79 2787.65,792.79 ; 2777.75,792.49 2787.65,792.49 ; 2778.05,719.89 2781.65,719.89 ; 2778.05,724.39 2780.45,724.39 ; 2778.05,757.39 2785.55,757.39 ; 2778.35,792.19 2787.65,792.19 ; 2778.95,757.09 2785.55,757.09 ; 2778.95,791.89 2787.35,791.89 ; 2779.25,719.59 2781.35,719.59 ; 2779.25,909.18 2844.35,909.18 ; 2779.55,756.79 2785.85,756.79 ; 2779.55,791.59 2787.35,791.59 ; 2779.85,719.29 2781.05,719.29 ; 2779.85,756.49 2785.85,756.49 ; 2779.85,909.48 2843.75,909.48 ; 2780.15,756.19 2785.85,756.19 ; 2780.15,791.29 2787.05,791.29 ; 2780.45,718.99 2780.75,718.99 ; 2780.45,755.89 2786.15,755.89 ; 2780.45,790.99 2787.05,790.99 ; 2780.45,909.78 2843.15,909.78 ; 2780.75,755.29 2786.15,755.29 ; 2780.75,755.59 2786.15,755.59 ; 2781.05,754.69 2786.15,754.69 ; 2781.05,754.99 2786.15,754.99 ; 2781.05,790.69 2787.05,790.69 ; 2781.35,753.79 2786.15,753.79 ; 2781.35,754.09 2786.15,754.09 ; 2781.35,754.39 2786.15,754.39 ; 2781.35,910.08 2842.25,910.08 ; 2781.65,738.49 2786.15,738.49 ; 2781.65,738.79 2786.15,738.79 ; 2781.65,739.09 2786.15,739.09 ; 2781.65,739.39 2786.15,739.39 ; 2781.65,739.69 2786.15,739.69 ; 2781.65,739.99 2786.15,739.99 ; 2781.65,740.29 2786.15,740.29 ; 2781.65,740.59 2786.15,740.59 ; 2781.65,740.89 2786.15,740.89 ; 2781.65,741.19 2786.15,741.19 ; 2781.65,741.49 2786.15,741.49 ; 2781.65,741.79 2786.15,741.79 ; 2781.65,742.09 2786.15,742.09 ; 2781.65,742.39 2786.15,742.39 ; 2781.65,742.69 2786.15,742.69 ; 2781.65,742.99 2786.15,742.99 ; 2781.65,743.29 2786.15,743.29 ; 2781.65,743.59 2786.15,743.59 ; 2781.65,743.89 2786.15,743.89 ; 2781.65,744.19 2786.15,744.19 ; 2781.65,744.49 2786.15,744.49 ; 2781.65,744.79 2786.15,744.79 ; 2781.65,745.09 2786.15,745.09 ; 2781.65,745.39 2786.15,745.39 ; 2781.65,745.69 2786.15,745.69 ; 2781.65,745.99 2786.15,745.99 ; 2781.65,746.29 2786.15,746.29 ; 2781.65,746.59 2786.15,746.59 ; 2781.65,746.89 2786.15,746.89 ; 2781.65,747.19 2786.15,747.19 ; 2781.65,747.49 2786.15,747.49 ; 2781.65,747.79 2786.15,747.79 ; 2781.65,748.09 2786.15,748.09 ; 2781.65,748.39 2786.15,748.39 ; 2781.65,748.69 2786.15,748.69 ; 2781.65,748.99 2786.15,748.99 ; 2781.65,749.29 2786.15,749.29 ; 2781.65,749.59 2786.15,749.59 ; 2781.65,749.89 2786.15,749.89 ; 2781.65,750.19 2786.15,750.19 ; 2781.65,750.49 2786.15,750.49 ; 2781.65,750.79 2786.15,750.79 ; 2781.65,751.09 2786.15,751.09 ; 2781.65,751.39 2786.15,751.39 ; 2781.65,751.69 2786.15,751.69 ; 2781.65,751.99 2786.15,751.99 ; 2781.65,752.29 2786.15,752.29 ; 2781.65,752.59 2786.15,752.59 ; 2781.65,752.89 2786.15,752.89 ; 2781.65,753.19 2786.15,753.19 ; 2781.65,753.49 2786.15,753.49 ; 2781.65,790.39 2786.75,790.39 ; 2781.95,910.38 2841.65,910.38 ; 2782.25,790.09 2786.75,790.09 ; 2782.85,789.79 2786.45,789.79 ; 2782.85,910.68 2840.75,910.68 ; 2783.45,789.49 2786.45,789.49 ; 2783.45,910.98 2840.15,910.98 ; 2784.05,789.19 2786.15,789.19 ; 2784.35,708.79 2789.15,708.79 ; 2784.35,709.09 2789.15,709.09 ; 2784.35,709.39 2789.15,709.39 ; 2784.35,709.69 2789.15,709.69 ; 2784.35,709.99 2789.15,709.99 ; 2784.35,710.29 2789.15,710.29 ; 2784.35,710.59 2789.15,710.59 ; 2784.35,710.89 2789.15,710.89 ; 2784.35,711.19 2789.15,711.19 ; 2784.35,711.49 2789.15,711.49 ; 2784.35,711.79 2788.85,711.79 ; 2784.35,712.09 2788.85,712.09 ; 2784.35,712.39 2788.85,712.39 ; 2784.35,712.69 2788.85,712.69 ; 2784.35,712.99 2788.85,712.99 ; 2784.35,713.29 2788.85,713.29 ; 2784.35,713.59 2789.15,713.59 ; 2784.35,713.89 2789.15,713.89 ; 2784.35,714.19 2789.15,714.19 ; 2784.35,714.49 2789.15,714.49 ; 2784.35,714.79 2789.15,714.79 ; 2784.35,715.09 2789.15,715.09 ; 2784.35,715.39 2789.15,715.39 ; 2784.35,715.69 2789.15,715.69 ; 2784.35,715.99 2789.15,715.99 ; 2784.35,911.28 2839.25,911.28 ; 2784.65,706.39 2790.35,706.39 ; 2784.65,706.69 2790.05,706.69 ; 2784.65,706.99 2789.75,706.99 ; 2784.65,707.29 2789.75,707.29 ; 2784.65,707.59 2789.45,707.59 ; 2784.65,707.89 2789.45,707.89 ; 2784.65,708.19 2789.45,708.19 ; 2784.65,708.49 2789.15,708.49 ; 2784.65,716.29 2789.15,716.29 ; 2784.65,716.59 2789.45,716.59 ; 2784.65,716.89 2789.45,716.89 ; 2784.65,717.19 2789.45,717.19 ; 2784.65,717.49 2789.75,717.49 ; 2784.65,717.79 2789.75,717.79 ; 2784.65,718.09 2790.05,718.09 ; 2784.65,718.39 2790.05,718.39 ; 2784.65,788.89 2786.15,788.89 ; 2784.95,705.49 2791.25,705.49 ; 2784.95,705.79 2790.95,705.79 ; 2784.95,706.09 2790.65,706.09 ; 2784.95,718.69 2790.35,718.69 ; 2784.95,718.99 2790.65,718.99 ; 2784.95,719.29 2791.25,719.29 ; 2784.95,719.59 2791.85,719.59 ; 2784.95,911.58 2838.65,911.58 ; 2785.25,704.59 2803.25,704.59 ; 2785.25,704.89 2803.25,704.89 ; 2785.25,705.19 2792.15,705.19 ; 2785.25,719.89 2793.35,719.89 ; 2785.25,720.19 2803.25,720.19 ; 2785.25,788.59 2785.85,788.59 ; 2785.55,704.29 2803.25,704.29 ; 2785.55,720.49 2803.25,720.49 ; 2785.55,720.79 2803.25,720.79 ; 2785.85,703.69 2803.25,703.69 ; 2785.85,703.99 2803.25,703.99 ; 2785.85,721.09 2803.25,721.09 ; 2785.85,911.88 2838.05,911.88 ; 2786.15,703.39 2803.25,703.39 ; 2786.15,721.39 2803.25,721.39 ; 2786.15,721.69 2803.25,721.69 ; 2786.45,703.09 2803.25,703.09